# EAGLE board capacitors (EAGLE 7.7.0)

Size 94 x 61 mm. Coordinates in mm from the lower left corner, seen from the top.
Outline: 0,0 94,0 94,61 0,61 0,0
Copper layers (1*16): Top 0.035mm / dielectric 1.5mm / Bottom 0.035mm
Design rules "default": minimum track width 10mil, minimum drill 24mil, track to track 8mil, track to pad 8mil, pad to pad 8mil, via to via 8mil, smd to smd 8mil, copper to edge 40mil, drill to drill 8mil, minimum pad ring 10mil, minimum via ring 8mil, stop-mask expansion 4mil, vias tented up to drill 0mil, thermal gap 10mil

## Footprints (pad centres in the part's own frame; a part is rotated, then mirrored left to right if it is on the bottom)
C0201 = smd 0.25 x 0.35: 1 -0.25,0; 2 0.25,0
C0402 = smd 0.7 x 0.9: 1 -0.65,0; 2 0.65,0
C0402K = smd 0.925 x 0.74: 1 -0.6,0; 2 0.6,0
C0504 = smd 1 x 1.3: 1 -0.7,0; 2 0.7,0
C0603 = smd 1.1 x 1: 1 -0.85,0; 2 0.85,0
C0603K = smd 1.05 x 1.08: 1 -0.875,0; 2 0.875,0
C0805 = smd 1.3 x 1.5: 1 -0.95,0; 2 0.95,0
C0805K = smd 1.3 x 1.6: 1 -1,0; 2 1,0
C1206 = smd 1.6 x 1.8: 1 -1.4,0; 2 1.4,0
C1206K = smd 1.5 x 2: 1 -1.5,0; 2 1.5,0
C1210 = smd 1.6 x 2.7: 1 -1.4,0; 2 1.4,0
C1210K = smd 1.5 x 2.9: 1 -1.5,0; 2 1.5,0
C1808 = smd 1.6 x 2.2: 1 -1.95,0; 2 1.95,0
C1812 = smd 1.9 x 3.4: 1 -1.95,0; 2 1.95,0
C1812K = smd 1.8 x 3.7: 1 -2.05,0; 2 2.05,0
C1825 = smd 1.9 x 6.8: 1 -1.95,0; 2 1.95,0
C1825K = smd 1.8 x 6.9: 1 -1.5,0; 2 1.5,0
C2220K = smd 1.85 x 5.5: 1 -2.55,0; 2 2.55,0
C2225K = smd 1.85 x 6.8: 1 -2.55,0; 2 2.55,0
C3640 = smd 2.6 x 10.7: 1 -4.267,0; 2 4.267,0
PANASONIC_A = smd 2 x 1.5: + 1.3,0; - -1.3,0
PANASONIC_B = smd 2.2 x 1.4: + 1.6,0; - -1.6,0
PANASONIC_C = smd 2.6 x 1.4: + 2.05,0; - -2.05,0
PANASONIC_D = smd 3 x 1.4: + 2.4,0; - -2.4,0
PANASONIC_E = smd 3.8 x 1.4: + 3,0; - -3,0
PANASONIC_F = smd 4 x 1.6: + 3.55,0; - -3.55,0
PANASONIC_G = smd 3.9 x 1.6: + 4.25,0; - -4.25,0
C225-087X268 = drill 1.016 octagon: 1 -11.303,0; 2 11.303,0
E2,5-5 = drill 0.813 pad 1.6: + -1.27,0 | drill 0.813 pad 1.6 octagon: - 1.27,0
E2-4 = drill 0.813 pad 1.27: + -1.016,0 | drill 0.813 pad 1.27 octagon: - 1.016,0
E2-5 = drill 0.813 pad 1.27: + -1.016,0 | drill 0.813 pad 1.27 octagon: - 1.016,0
E5-10,5 = drill 1.016 pad 2.54: + -2.54,0 | drill 1.016 pad 2.54 octagon: - 2.54,0
EB35D = drill 2.007 pad 4.597: + -5.08,0 | drill 2.007 pad 4.597 octagon: - 5.08,0
C3216 = smd 1.6 x 1.8: 1 -1.4,0; 2 1.4,0

## Placement (x,y rotation side)
E$1  [C0201]  5,5 90 top
E$2  [C0402]  7,6 90 top
E$3  [C0402K]  8.4,6 90 top
E$4  [C0504]  10.5,6.1 90 top
E$5  [C0603]  13,6.1 90 top
E$6  [C0603K]  5.1,7.7 90 top
E$7  [C0805]  7.3,9.4 90 top
E$8  [C0805K]  9.6,9.5 90 top
E$9  [C1206]  12.1,10.6 90 top
E$10  [C1206K]  14.8,10.6 90 top
E$11  [C1210]  18.3,6.9 90 top
E$12  [C1210K]  18.4,12 90 top
E$13  [C1808]  5.4,14.7 90 top
E$14  [C1812]  9.6,17.1 90 top
E$15  [C1812K]  14.3,17.3 90 top
E$16  [C1825]  23.7,8.5 180 top
E$17  [C1825K]  30.2,8.4 0 top
E$18  [C2220K]  23.8,16.5 180 top
E$19  [C2225K]  31.7,16.4 0 top
E$20  [C3640]  42,11.3 90 top
E$21  [PANASONIC_A]  5.5,24.8 90 top
E$22  [PANASONIC_B]  10.5,24.8 90 top
E$23  [PANASONIC_C]  16.2,25 90 top
E$24  [PANASONIC_D]  23.5,25.3 90 top
E$25  [PANASONIC_E]  32,26.1 90 top
E$26  [PANASONIC_F]  41.6,25.5 90 top
E$27  [PANASONIC_G]  52.5,25 90 top
E$28  [C225-087X268]  16.6,35.8 0 top
E$29  [E2,5-5]  35.1,53.6 0 top
E$30  [E2-4]  35.3,47 0 top
E$31  [E2-5]  35.5,40.3 0 top
E$32  [E5-10,5]  46.4,51.8 0 top
E$33  [EB35D]  71.2,42.6 0 top
E$34  [C3216]  50,14 90 top

## Library data of the parts
E$1-E$34 = rcl